# EAGLE board 20W-IR-Blaster (EAGLE 9.6.2)

Size 86.36 x 17.78 mm. Coordinates in mm from the lower left corner, seen from the top.
Outline: 16.51,0 86.36,0 86.36,17.78 16.51,17.78 16.51,11.43 8.89,11.43 8.89,17.78 0,17.78 0,0 8.89,0 8.89,6.35 16.51,6.35 16.51,0
Copper layers (1*16): Top 0.035mm / dielectric 1.5mm / Bottom 0.035mm
Design rules "default *": minimum track width 6mil, minimum drill 0.35mm, track to track 6mil, track to pad 6mil, pad to pad 6mil, via to via 6mil, smd to smd 6mil, copper to edge 10mil, drill to drill 6mil, minimum pad ring 10mil, minimum via ring 8mil, stop-mask expansion 4mil, vias tented up to drill 0mil, thermal gap 10mil
Holes 0.9 mm at 15.88,11.43 15.88,10.16 15.88,8.89 15.88,7.62 15.88,6.35 9.53,6.35 9.53,7.62 9.53,8.89 9.53,10.16 9.53,11.43

## Footprints (pad centres in the part's own frame; a part is rotated, then mirrored left to right if it is on the bottom)
C3216 = smd 1.6 x 1.8: 1 -1.4,0; 2 1.4,0
C0603 = smd 1.1 x 1: 1 -0.85,0; 2 0.85,0
DIODE_VSMA1094250_VIS = smd 0.55 x 2.8: 1 -1.125,0; 3 1.125,0 | smd 1 x 2.8: 2 0,0
DO-214AC = smd 1.8 x 1.7: A 2.05,0; C -2.05,0
LED-0603 = smd 1 x 1: A -0.877,0; C 0.877,0
R1206 = smd 1.6 x 1.803: 1 -1.422,0; 2 1.422,0
1X08 = drill 1.016 long: 1 -8.89,0; 2 -6.35,0; 3 -3.81,0; 4 -1.27,0; 5 1.27,0; 6 3.81,0; 7 6.35,0; 8 8.89,0
R0603 = smd 1 x 1.1: 1 -0.85,0; 2 0.85,0
R2512 = smd 1.8 x 3.2: 1 -2.8,0; 2 2.8,0
R0805 = smd 1.3 x 1.5: 1 -0.95,0; 2 0.95,0
P1-20Y = drill 2.007 pad 2.54 long: TP 0,0
P2-38-17 = drill 1.702 pad 2.121 long: TP-1 -1.905,0; TP-2 1.905,0
QFN50P350X350X100-17N = smd 0.86 x 0.26: 1 -1.685,0.75; 2 -1.685,0.25; 3 -1.685,-0.25; 4 -1.685,-0.75; 9 1.685,-0.75; 10 1.685,-0.25; 11 1.685,0.25; 12 1.685,0.75 | smd 0.26 x 0.86: 5 -0.75,-1.685; 6 -0.25,-1.685; 7 0.25,-1.685; 8 0.75,-1.685; 13 0.75,1.685; 14 0.25,1.685; 15 -0.25,1.685; 16 -0.75,1.685 | smd 2.14 x 2.14: 17 0,0
SOIC_63D8L-7_DIO = smd 0.559 x 1.27: 1 -0.915,-0.965; 2 0.915,-0.965; 3 0,0.965
RGY14_2P05X2P05 = smd 0.28 x 0.85: 1 -0.75,1.731; 7 -0.75,-1.731; 8 0.75,-1.731; 14 0.75,1.731 | smd 0.85 x 0.28: 2 -1.769,1; 3 -1.769,0.5; 4 -1.769,0; 5 -1.769,-0.5; 6 -1.769,-1; 9 1.769,-1; 10 1.769,-0.5; 11 1.769,0; 12 1.769,0.5; 13 1.769,1 | smd 2.05 x 2.05: 15 0,0 | drill 0.254 pad 0.508: V -0.406,-0.406; V_1 -0.406,0.406; V_2 0.406,-0.406; V_3 0.406,0.406
RTE0016C-IPC_A = smd 0.931 x 0.239: 1 -1.491,0.75; 2 -1.491,0.25; 3 -1.491,-0.25; 4 -1.491,-0.75; 9 1.491,-0.75; 10 1.491,-0.25; 11 1.491,0.25; 12 1.491,0.75 | smd 0.239 x 0.931: 5 -0.75,-1.491; 6 -0.25,-1.491; 7 0.25,-1.491; 8 0.75,-1.491; 13 0.75,1.491; 14 0.25,1.491; 15 -0.25,1.491; 16 -0.75,1.491 | smd 1.75 x 1.75: 17 0,0
TSOT6 = smd 0.6 x 1.05: 1 -0.95,-1.3; 2 0,-1.3; 3 0.95,-1.3; 4 0.95,1.3; 5 0,1.3; 6 -0.95,1.3
CYH127-4.7UH = smd 2.54 x 5.08: P$1 -5.08,0; P$2 5.08,0
LEFT-H1-SMD = smd 1 x 2: 1 0,1.65; 2 2.54,1.65; 3 5.08,1.65; 4 7.62,1.652; 5 10.16,1.65; 6 12.7,1.652; 7 15.24,1.65; 8 17.78,1.652
RIGHT-H2-SMD = smd 1.02 x 6: 1 0,0; 2 2.54,0; 3 5.08,0; 4 7.62,0; 5 10.16,0; 6 12.7,0; 7 15.24,0; 8 17.78,0; 9 20.32,0; 10 22.86,0

## Placement (x,y rotation side)
C1  22uf  [C3216]  126.37,48.58 0 top  (outside the outline)
C2  22uf  [C3216]  125.09,44.13 0 top  (outside the outline)
C3  22uf  [C3216]  125.73,40.96 0 top  (outside the outline)
C4  100nf  [C0603]  121.92,61.91 0 top  (outside the outline)
C5  220pf  [C0603]  130.18,54.29 0 top  (outside the outline)
C6  2.2uf  [C0603]  70.48,7.3 0 top
C7  1uf  [C0603]  58.42,38.42 0 top  (outside the outline)
C8  100nf  [C0603]  88.27,28.89 0 top  (outside the outline)
C9  100nf  [C0603]  81.92,28.89 0 top  (outside the outline)
C10  1uf  [C0603]  57.47,5.71 270 top
C11  1uf  [C0603]  63.5,38.42 0 top  (outside the outline)
C12  100nf  [C0603]  75.56,28.89 0 top  (outside the outline)
C13  100nf  [C0603]  69.22,28.89 0 top  (outside the outline)
C14  22pf  [C0603]  61.91,1.91 90 top
C15  22uf  [C3216]  65.41,11.75 0 top
C18  22uf  [C3216]  30.16,6.35 90 top
CR1  VSMA1094250  [DIODE_VSMA1094250_VIS]  6.35,3.81 180 bottom
CR2  VSMA1094250  [DIODE_VSMA1094250_VIS]  6.35,8.89 180 bottom
CR3  VSMA1094250  [DIODE_VSMA1094250_VIS]  2.54,11.43 0 bottom
CR4  VSMA1094250  [DIODE_VSMA1094250_VIS]  2.54,6.35 0 bottom
CR5  VSMA1094250  [DIODE_VSMA1094250_VIS]  6.35,13.97 180 bottom
D1  SS34-A  [DO-214AC]  75.56,20 0 top
D2  SS34-A  [DO-214AC]  64.77,14.92 0 top
D3  Red  [LED-0603]  89.85,13.97 90 top  (outside the outline)
D4  Red  [LED-0603]  89.85,10.16 90 top  (outside the outline)
D5  Green  [LED-0603]  89.85,6.35 90 top  (outside the outline)
D6  Green  [LED-0603]  89.85,2.54 90 top  (outside the outline)
D7  Blue  [LED-0603]  89.85,-1.27 90 top  (outside the outline)
D8  Yellow  [LED-0603]  89.85,17.78 90 top  (outside the outline)
F1  FUSE  [R1206]  133.98,15.56 0 top  (outside the outline)
JP1  [1X08]  49.53,-24.13 0 top  (outside the outline)
R1  100K  [R0603]  115.57,66.36 0 top  (outside the outline)
R2  22.1K  [R0603]  137.16,57.47 0 top  (outside the outline)
R3  10K  [R0603]  139.06,52.39 0 top  (outside the outline)
R4  9.31K  [R0603]  40.64,22.54 0 top  (outside the outline)
R5  430K  [R0603]  85.09,33.34 0 top  (outside the outline)
R6  100R  [R0603]  68.58,24.45 0 top  (outside the outline)
R7  100K  [R0603]  78.74,33.34 0 top  (outside the outline)
R8  22.1K  [R0603]  34.29,22.54 0 top  (outside the outline)
R9  300K  [R0603]  63.82,5.08 270 top
R10  105K  [R0603]  59.37,1.91 270 top
R11  2R  [R2512]  70.17,12.7 270 top
R12  10R  [R2512]  60.64,9.53 90 top
R13  10m  [R0805]  87.63,25.72 0 top  (outside the outline)
R14  10K  [R0603]  23.81,9.21 270 top
R15  10K  [R0603]  23.81,15.56 270 top
R16  100R  [R0603]  26.04,12.38 270 top
R17  10K  [R0603]  23.81,12.38 270 top
R18  100R  [R0603]  26.04,9.21 270 top
R19  10K  [R0603]  44.45,26.99 0 top  (outside the outline)
R20  1K  [R0603]  100.65,15.88 90 top  (outside the outline)
R21  1K  [R0603]  100.65,10.79 90 top  (outside the outline)
R22  1K  [R0603]  100.65,5.71 90 top  (outside the outline)
R23  1K  [R0603]  100.65,0.64 90 top  (outside the outline)
R25  1K5  [R0603]  110.49,2.86 0 top  (outside the outline)
R26  1K  [R0603]  109.86,7.94 0 top  (outside the outline)
R27  1K5  [R0603]  109.86,11.75 0 top  (outside the outline)
R28  1K  [R0603]  110.49,16.19 0 top  (outside the outline)
R29  1K5  [R0603]  132.08,64.45 0 top  (outside the outline)
R30  1K  [R0603]  116.2,2.22 0 top  (outside the outline)
R31  100R  [R0603]  26.04,15.56 270 top
SC+  TPPAD1-20Y  [P1-20Y]  31.43,1.91 270 top
SC-  TPPAD1-20Y  [P1-20Y]  31.43,15.88 90 top
TH  TP2P2-38-17  [P2-38-17]  19.05,-11.11 0 top  (outside the outline)
TH1  TH  [R0603]  4.45,8.89 90 top
U1  BQ24640RVAR  [QFN50P350X350X100-17N]  53.98,8.57 180 top
U2  DMN63D8L-7  [SOIC_63D8L-7_DIO]  58.42,29.21 0 top  (outside the outline)
U3  DMN63D8L-7  [SOIC_63D8L-7_DIO]  52.07,29.21 0 top  (outside the outline)
U4  DMN63D8L-7  [SOIC_63D8L-7_DIO]  20.96,8.89 180 top
U5  DMN63D8L-7  [SOIC_63D8L-7_DIO]  20.96,15.24 180 top
U7  DMN63D8L-7  [SOIC_63D8L-7_DIO]  20.96,12.06 180 top
U9  SN74LVC08ARGYR  [RGY14_2P05X2P05]  96.2,9.53 90 top  (outside the outline)
U10  LM339LVRTER  [RTE0016C-IPC_A]  95.89,15.56 0 top  (outside the outline)
U$1  SY8113IADC  [TSOT6]  126.37,53.66 0 top  (outside the outline)
U$2  4.7uh  [CYH127-4.7UH]  136.84,40.64 90 top  (outside the outline)
U$3  15uh  [CYH127-4.7UH]  42.86,8.89 90 top
U$4  LEFT-H1-SMD  [LEFT-H1-SMD]  39.37,8.89 0 bottom
U$5  RIGHT-H2-SMD  [RIGHT-H2-SMD]  80.01,8.89 0 bottom

## Library data of the parts
C1-C15 C18 = rcl; SPICEPREFIX: C
CR1-CR5 = VSMA1094250; COPYRIGHT: Copyright (C) 2025 Ultra Librarian. All rights reserved.; MANUFACTURER_PART_NUMBER: VSMA1094250; MFR_NAME: Vishay
D1 D2 = SS34-A; AVAILABILITY: In Stock; CHECK_PRICES: https://www.snapeda.com/parts/SS34A/TE+Connectivity+AMP+Connectors/view-part/?ref=eda; DESCRIPTION: 34 Position Cable Assembly Rectangular Socket to Cable 3.00' (914.40mm); MF: TE Connectivity; MP: SS34A; PACKAGE: DO-214 Multicomp; PRICE: None; SNAPEDA_LINK: https://www.snapeda.com/parts/SS34A/TE+Connectivity+AMP+Connectors/view-part/?ref=snap
D3 D4 = SparkFun-LED; PROD_ID: DIO-00819
D5 D6 = SparkFun-LED; PROD_ID: DIO-00821
D7 = SparkFun-LED; PROD_ID: DIO-08575
D8 = SparkFun-LED; PROD_ID: DIO-09003
F1 R1-R23 R25-R31 TH1 = rcl; SPICEPREFIX: R
JP1 = pinhead
SC+ SC- TH = testpad
U1 = BQ24640RVAR
U2-U5 U7 = AO3400; COPYRIGHT: Copyright (C) 2025 Ultra Librarian. All rights reserved.; MANUFACTURER_PART_NUMBER: DMN63D8L-7; MFR_NAME: Diodes Inc
U9 = SN74LVC08ARGYR; COPYRIGHT: Copyright (C) 2025 Ultra Librarian. All rights reserved.; MANUFACTURER_PART_NUMBER: SN74LVC08ARGYR; MFR_NAME: Texas Instruments
U10 = LM339LVRTER; COPYRIGHT: Copyright (C) 2025 Ultra Librarian. All rights reserved.; MANUFACTURER_PART_NUMBER: LM339LVRTER; MFR_NAME: Texas Instruments; REFDES: RefDes; TYPE: TYPE
U$1 = SY8113IADC
U$2 U$3 = CYH127-4.7UH
U$4 U$5 = Flipper-Zero-GPIO-Headers

## Nets
+3V3: C2.1 C3.1 C5.1 D2.A R1.2 R11.1 R20.1 R23.1 R29.2 TH1.1 U9.14 U10.1 U$2.P$2
+5V: C1.1 F1.2 R3.2 U$1.5
GND: C1.2 C2.2 C3.2 C5.2 C6.2 C7.2 C8.2 C10.2 C11.2 C12.2 C15.2 C18.2 D8.C R2.1 R5.1 R8.2 R10.2 R14.2 R15.2 R17.2 R19.2 R21.2 R22.2 R25.2 R26.2 R27.2 R28.2 R30.1 SC-.TP TH.TP-1 U1.11 U1.17 U3.3 U4.3 U5.3 U7.3 U9.7 U9.15 U10.12 U10.17 U$1.2 U$4.8 U$5.3 U$5.10
INPUT: U9.5 U$4.2
N$1: R3.1 U$1.4
N$2: C4.1 U$1.1
N$3: C4.2 U$1.6 U$2.P$1
N$4: C9.2 U1.14 U2.3 U3.2 U$3.P$1
N$5: R1.1 R2.2 U$1.3
N$6: C6.1 R11.2
N$7: C15.1 D2.C R12.2 U2.2
N$8: C10.1 R12.1 U1.1
N$9: U1.15 U2.1
N$10: U1.13 U3.1
N$11: C9.1 D1.C U1.16
N$12: C11.1 D1.A U1.12
N$13: CR1.1 CR2.1 CR3.1 CR4.1 CR5.1 U4.2 U5.2 U7.2
N$14: R19.1 R20.2 U10.4 U10.5
N$15: R15.1 R31.1 U5.1
N$16: C14.2 R9.2 R10.1 U1.8
N$17: C8.1 R6.1 U1.4
N$18: F1.1 U$4.1
N$19: R14.1 R18.1 U4.1
N$20: R21.1 R23.2 U10.7 U10.11
N$21: R16.1 R17.1 U7.1
N$24: U9.3 U9.4
N$25: R7.2 R8.1 U1.7
N$26: R22.1 TH1.2 U10.8 U10.9
N$27: D3.C R25.1
N$28: D5.C R26.1
N$29: D4.C R27.1
N$30: D6.C R28.1
N$31: D8.A R29.1
N$32: D7.C R30.2
SC_THERM: R4.1 R5.2 R6.2 TH.TP-2
SRP: C12.1 C13.1 R13.1 U1.10 U$3.P$2
T_NOK: D4.A U10.14
T_OK: D6.A U9.2 U10.13
TRIG: D7.A R16.2 R18.2 R31.2 U9.6
V+: C13.2 C14.1 C18.1 CR1.2 CR1.3 CR2.2 CR2.3 CR3.2 CR3.3 CR4.2 CR4.3 CR5.2 CR5.3 R9.1 R13.2 SC+.TP U1.9 U10.2 U10.6
V_NOK: D3.A U10.16
V_OK: D5.A U9.1 U10.15
VREF: C7.1 R4.2 R7.1 U1.2 U1.6

## Tracks (layer width: path | path; a pad name or v marks a point on that pad's centre or on a via)
+3V3  (12 unrouted)
+5V  (3 unrouted)
GND  (43 unrouted)
INPUT  (1 unrouted)
N$1  (1 unrouted)
N$2  (1 unrouted)
N$3  (2 unrouted)
N$4  (4 unrouted)
N$5  (2 unrouted)
N$6  (1 unrouted)
N$7  (3 unrouted)
N$8  (2 unrouted)
N$9  (1 unrouted)
N$10  (1 unrouted)
N$11  (2 unrouted)
N$12  (2 unrouted)
N$13  (7 unrouted)
N$14  (3 unrouted)
N$15  (2 unrouted)
N$16  (3 unrouted)
N$17  (2 unrouted)
N$18  (1 unrouted)
N$19  (2 unrouted)
N$20  (3 unrouted)
N$21  (2 unrouted)
N$24  (1 unrouted)
N$25  (2 unrouted)
N$26  (3 unrouted)
N$27  (1 unrouted)
N$28  (1 unrouted)
N$29  (1 unrouted)
N$30  (1 unrouted)
N$31  (1 unrouted)
N$32  (1 unrouted)
SC_THERM  (3 unrouted)
SRP  (4 unrouted)
T_NOK  (1 unrouted)
T_OK  (2 unrouted)
TRIG  (4 unrouted)
V+  (18 unrouted)
V_NOK  (1 unrouted)
V_OK  (2 unrouted)
VREF  (4 unrouted)